# EAGLE board Copy of ILKDJ - Electronics (EAGLE 7.6.0)

Size 56.82 x 53.33 mm. Coordinates in mm from the lower left corner, seen from the top.
Outline: 0,0 56.82,0 56.82,53.33 0,53.33 0,0
Copper layers (1*16): Top 0.035mm / dielectric 1.5mm / Bottom 0.035mm
Design rules "default": minimum track width 10mil, minimum drill 24mil, track to track 8mil, track to pad 8mil, pad to pad 8mil, via to via 8mil, smd to smd 8mil, copper to edge 40mil, drill to drill 8mil, minimum pad ring 10mil, minimum via ring 8mil, stop-mask expansion 4mil, vias tented up to drill 0mil, thermal gap 10mil

## Footprints (pad centres in the part's own frame; a part is rotated, then mirrored left to right if it is on the bottom)
DC-POWER = drill 0.889 pad 2.54 octagon: + 0,2.54; - 0,-2.54
C5B2.5 = drill 0.813 pad 1.6 octagon: 1 -2.54,0; 2 2.54,0
0207/10 = drill 0.813 octagon: 1 -5.08,0; 2 5.08,0
TO92 = drill 0.813 octagon: 1 1.27,0; 2 0,1.905; 3 -1.27,0

## Placement (x,y rotation side)
BAT1  [DC-POWER]  5,48.18 0 top
C1  1uF  [C5B2.5]  5,111.68 0 top  (outside the outline)
FUNC1  [DC-POWER]  5,137.08 0 top  (outside the outline)
Meter2  [DC-POWER]  5,149.78 0 top  (outside the outline)
RR1  6.15k‎Ω  [0207/10]  5,60.88 0 top  (outside the outline)
RR2  3.3k‎Ω  [0207/10]  5,98.98 0 top  (outside the outline)
RR3  55.5k‎Ω  [0207/10]  5,73.58 0 top  (outside the outline)
RR4  21.5k‎Ω  [0207/10]  5,124.38 0 top  (outside the outline)
T1  [TO92]  5,10.08 0 top
T2  [TO92]  5,86.28 0 top  (outside the outline)
U1  [DC-POWER]  5,22.78 0 top
U2  [DC-POWER]  5,35.48 0 top

## Library data of the parts
BAT1 C1 FUNC1 Meter2 RR1-RR4 T1 T2 U1 U2 = AUTODESK_CIRCUITS_BREADBOARD

## Nets
N$1: BAT1.+ RR1.1 RR3.1
N$2: C1.1 Meter2.+ RR3.2 RR4.1 T2.2
N$3: RR1.2 T1.3 T2.3
N$4: RR2.1 T2.1 U2.+
N$5: FUNC1.+ T1.2 U1.+
N$6: BAT1.- C1.2 FUNC1.- Meter2.- RR2.2 RR4.2 T1.1 U1.- U2.-

## Tracks (layer width: path | path; a pad name or v marks a point on that pad's centre or on a via)
N$1  (2 unrouted)
N$2  (4 unrouted)
N$3  (2 unrouted)
N$4  (2 unrouted)
N$5  (2 unrouted)
N$6  (8 unrouted)